# Altium PCB LogicShifter.PcbDoc
Units mm, origin at the board's own origin, x right, y up, seen from the top; angles counter-clockwise.
Board outline 5.6 x 3.8 mm, 2 copper layers (Top Layer, Bottom Layer); 6 components, 6 nets, 13 pads, 5 vias.
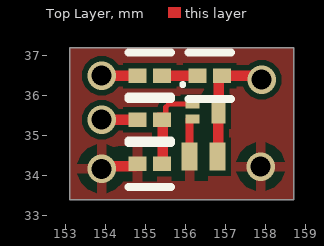
[diagram p0: Top Layer view]
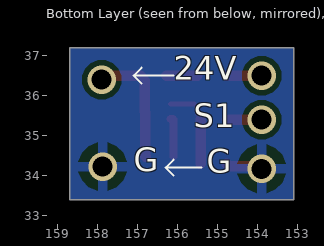
[diagram p1: Bottom Layer view, seen from below]
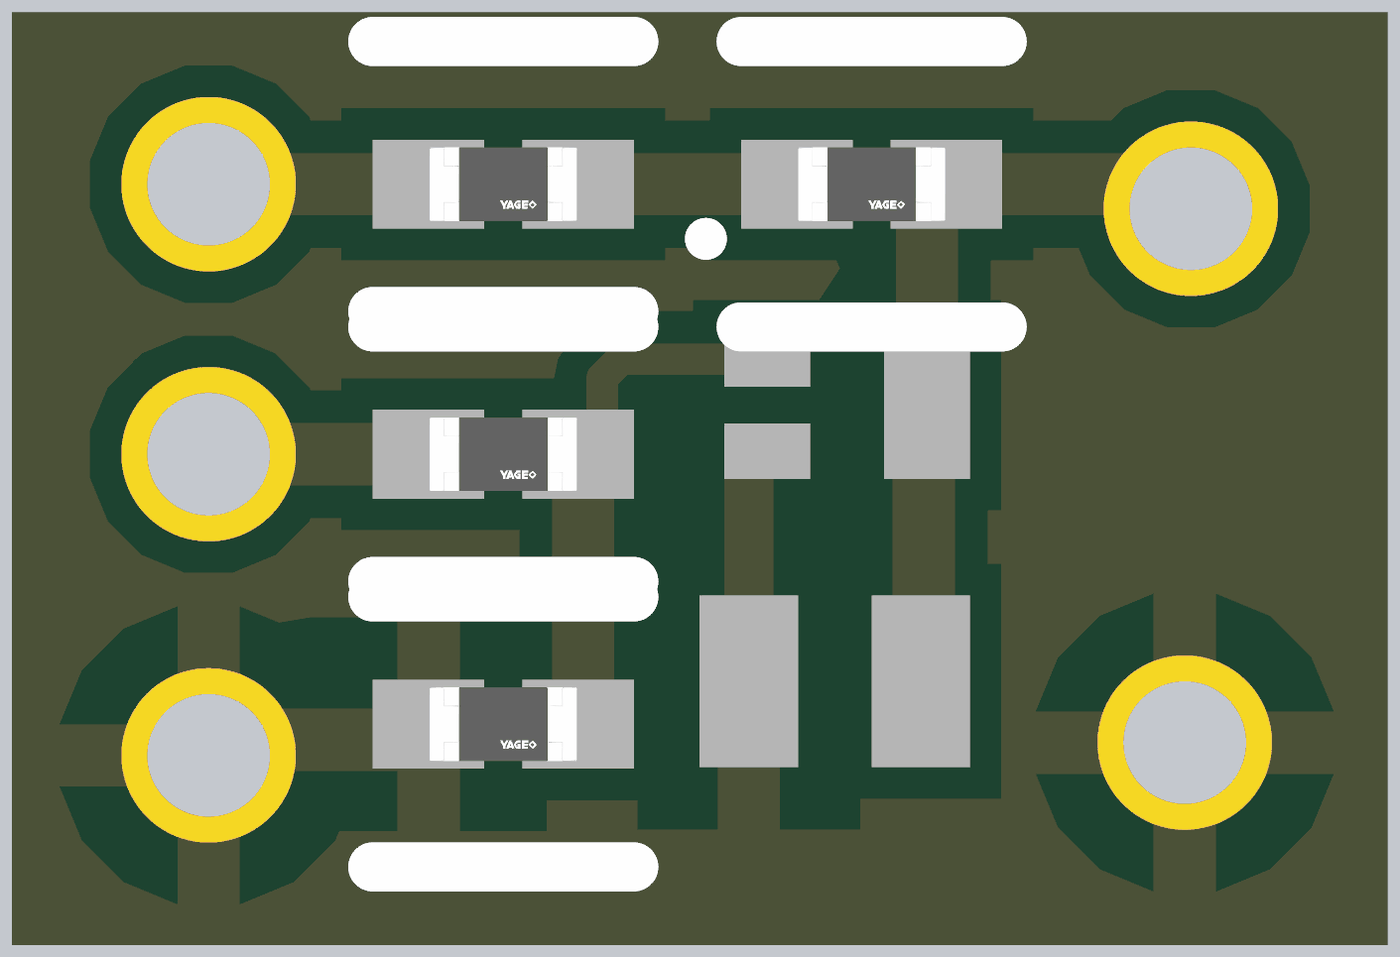
[diagram p2: 3D render of the assembled board from above, using the file's embedded part models]

## Layer stack, top to bottom
Top Solder: solder mask 0.0102, Solder Resist, Dk 3.5
Top Layer: signal copper 0.0356
Dielectric 1: dielectric 0.32, FR-4, Dk 4.8
Bottom Layer: signal copper 0.0356
Bottom Solder: solder mask 0.0102, Solder Resist, Dk 3.5

## Board outline
153.1,33.4 153.1,37.2 158.7,37.2 158.7,33.4

## Design rules (kind name [scope] priority, off if disabled: settings)
Clearance [All] p1: gap=0.128 ignorepadtopadclearanceinfootprint=TRUE
PolygonConnect [All] p1: connectstyle=Relief reliefconductorwidth=0.254 reliefentries=4 polygonreliefangle="90 Angle" airgapwidth=0.254
RoutingVias [All] p1: holewidth=0.711 width=1.27 viastyle="Through Hole" minholewidth=0.711 minwidth=1.27 maxholewidth=0.711 maxwidth=1.27
SolderMaskExpansion [All] p1: expansion=0 istentingtop=FALSE
SupplyNets "Schematic Supply Nets" [InNet('GND')] p1: voltage=0.000
Width [All] p1: maxlimit=0.254 minlimit=0.128 preferedwidth=0.254
30 further rules are at their usual default settings.

## Components (designator, comment, footprint, x,y, rotation, side; value= is the part's Value field where it differs from the comment)
D1 "PESD36VL1BLYL" PESD36VL1BLYL 156.45,34.475 r0 top
Q1 "" INF-TSLP-3-1_V 156.5,35.6 r270 top
R1 "AF0201JR-074K7L" FP-AF0201-IPC_B 155.1,36.5 r0 top value=4.7kR
R2 "AF0201JR-074K7L" FP-AF0201-IPC_B 156.6,36.5 r0 top value=4.7kR
R3 "AF0201JR-072K2L" FP-AF0201-IPC_B 155.1,35.4 r0 top value=2.2kR
R4 "AF0201FR-0710KL" FP-AF0201-IPC_B 155.1,34.3 r0 top value=10kR

## Footprints (in the part's own frame and the unit in brackets; to place one, negate y for a bottom-side part, rotate by r counter-clockwise, add the part's x,y. Pads: shape width x height; smd on the part's side, far side on the other; paste and mask are expansions set on the pad)
FP-AF0201-IPC_B [mm]
  rect 0.454x0.363 smd paste+0 mask+0: 1(-0.304,0) 2(0.304,0)
  silkscreen extent -0.53,-0.58 0.53,0.58, body extent -0.68,-0.33 0.68,0.33, height 0.25
INF-TSLP-3-1_V [mm] "TSLP, 3-Leads, Body 0.6x1 mm"
  rect 0.225x0.35 smd: 1(-0.188,-0.325) 2(0.188,-0.325)
  rect 0.6x0.35 smd: 3(0,0.325)
  silkscreen extent -0.71,-0.61 -0.64,-0.54, body extent -0.3,-0.5 0.3,0.5, height 0.5
PESD36VL1BLYL [mm]
  rect 0.4x0.7 smd: 1(-0.35,0) 2(0.35,0)

## Part data
D1: "TVS Diode (Bi-directional)", Manufacturer_Name=Nexperia, Arrow Part Number=PESD36VL1BLYL, Arrow Price/Stock=https://www.arrow.com/en/products/pesd36vl1blyl/nexperia?utm_currency=USD&region=nac, Datasheet Link=https://assets.nexperia.com/documents/data-sheet/PESD36VL1BL.pdf, Height=0.5mm, Manufacturer_Part_Number=PESD36VL1BLYL
Q1: library part CMP-1177-00106-1, "NPN Silicon AF Transistor, 45 V VCEO, 100 mA IC, TSLP-3-1. BC846BMB,BC847BL3, BC847AMB as counterpart.", Manufacturer=Infineon, PartNumber=BC847BL3, ComponentLink1Description="Manufacturer URL", ComponentLink1URL=http://www.infineon.com/, ComponentLink2Description=Datasheet, ComponentLink2URL=http://www.infineon.com/dgdl/bc847series_bc848series_bc849series_bc850series.pdf?folderId=db3a304314dca389011541d30fa21656&fileId=db3a304314dca389011541d4630a1657, ComponentLink3Description="Package Specification", ComponentLink3URL=http://www.infineon.com/dgdl/TSLP-3-1-Package_Overview.pdf?folderId=db3a30431936bc4b011957434db737d2&fileId=db3a30431936bc4b0119577ed2783818, fT (typ)="250Â MHz", Green=TRUE, Halogen-free=TRUE, IBM (max)="200Â mA", IC (max)="100Â mA", ICBO (max)="15Â nA", ICM (max)="200Â mA", Mounting Technology="Surface Mount", PackageDescription="3-Pin Thin Small Leadless Package, 0.6 x 1 mm Body", PackageReference=TSLP-3-1, Packing=Reel, Polarity=NPN, Ptot (max)="250Â mW", VCBO (max)="50Â V", VCEO (max)="45 V", VEBO (max)="6Â V"
R1 R2: library part CMP-03412-043932-1, "Anti-Sulfurated Chip Resistors Automotive Grade 4.7kΩ 5% 200ppm/°C 0201", Case/Package=0201, Max Operating Temperature=125°C, Max Power Dissipation=50mW, Min Operating Temperature=-55°C, Resistance=4.7kR, Resistor Type="Thick Film", Temperature Coefficient=200ppm/°C, Tolerance=5%, Features="Moisture Resistant", Height=0.01inch, Length=0.024inch, Number of Terminations=2, Packaging="Tape and Reel", RoHS Compliant=Yes, Series=AF, Width=0.012inch
R3: library part CMP-03412-038239-1, "Anti-Sulfurated Chip Resistors Automotive Grade 2.2kΩ 5% 200ppm/°C 0201", Case/Package=0201, Max Operating Temperature=125°C, Max Power Dissipation=50mW, Min Operating Temperature=-55°C, Resistance=2.2kR, Resistor Type="Thick Film", Temperature Coefficient=200ppm/°C, Tolerance=5%, Features="Moisture Resistant", Height=0.01inch, Length=0.024inch, Number of Terminations=2, Packaging="Tape and Reel", RoHS Compliant=Yes, Series=AF, Width=0.012inch
R4: library part CMP-03412-039040-1, "Anti-Sulfurated Chip Resistors Automotive Grade 10kΩ 1% 200ppm/°C 0201", Case/Package=0201, Max Operating Temperature=125°C, Max Power Dissipation=50mW, Min Operating Temperature=-55°C, Resistance=10kR, Resistor Type="Thick Film", Temperature Coefficient=200ppm/°C, Tolerance=1%, Features="Moisture Resistant", Height=0.01inch, Length=0.024inch, Number of Terminations=2, Packaging="Tape and Reel", RoHS Compliant=Yes, Series=AF, Width=0.012inch

## Via types
v1: diameter 0.711, hole 0.5, Top Layer to Bottom Layer, 5 vias

## Nets (pads, with @x,y where several pads share a name; then routed paths per layer and width w, separated by ;. In a path a pad name is that pad's centre, name@x,y a point inside that pad or via, vN(x,y) a via of type N, cw(c..) or ccw(c..) an arc to the next point about the centre after c; other vN are vias at no path point)
24V: R1.1 | length 0.9
  Top Layer w0.254: v1(153.9,36.5) R1.1@154.775,36.5
ENCODER: R3.1 | length 0.9
  Top Layer w0.254: v1(153.9,35.4) R3.1@154.775,35.4
GND: D1.1 Q1.2 R4.1 | length 1.9
  Top Layer w0.2: D1.1 156.1,35.4 156.113,35.412 Q1.2
  Top Layer w0.254: v1(153.9,34.173) 153.963,34.236 154.727,34.236 154.775,34.285 R4.1@154.775,34.3
  other v1: 157.875,34.225
NetQ1_1: Q1.1 R3.2 R4.2 | length 2.3
  Top Layer w0.128: R3.2@155.425,35.4 155.314,35.511 155.478,35.511 155.503,35.536 155.503,35.713 155.578,35.788 Q1.1
  Top Layer w0.254: R4.2@155.425,34.3 R3.2@155.425,35.4
NetR1_2: R1.2 R2.1 | length 0.8
  Top Layer w0.254: R1.2@155.504,36.5 R2.1
S_OUT: D1.2 Q1.3 R2.2 | length 3.1
  Top Layer w0.254: D1.2 156.812,34.488 156.812,35.587 Q1.3 156.825,36.375 156.925,36.475 156.925,36.5 157.676,36.5 157.776,36.4 v1(157.9,36.4)

## Polygon pours and split planes (outlines as drawn)
GND on Bottom Layer "GND_L02_P001" (solid, pour order 1): 153.1,37.2 158.7,37.2 158.7,33.4 153.1,33.4
GND on Top Layer "GND_L01_P002" (solid, pour order 2): 158.7,37.2 158.7,33.4 153.1,33.4 153.1,37.2

## Silkscreen, mask and mechanical layers (free items; w line width, h text height)
Bottom Overlay:
  lines w0.05: 155.4,34.2 156.3,34.2 ; 156.1,34 156.3,34.2 ; 156.1,36.5 157.1,36.5 ; 156.9,36.3 157.1,36.5 ; 156.3,34.2 156.1,34.4 156.3,34.2 ; 157.1,36.5 156.9,36.7 157.1,36.5
  text "24V" at 156.101,36.2 h1
  text "S1" at 155.6,35.011 h1
  text "G" at 157.1,33.911 h1
  text "G" at 155.277,33.876 h1
Mechanical 1:
  the board outline again, w0.254